# EAGLE board serial-header (EAGLE 6.4)
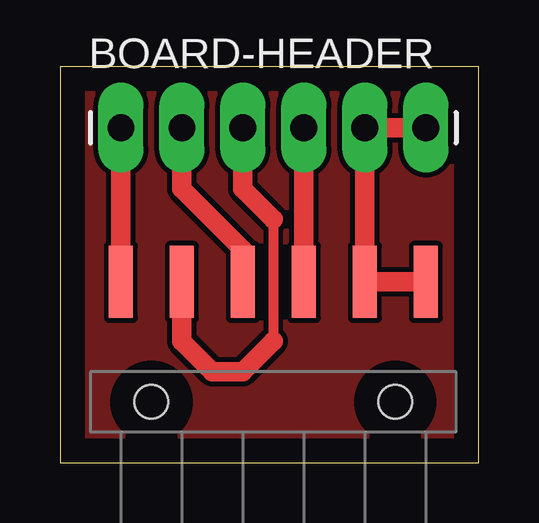
[diagram p0: board, top side]

Size 17.45 x 16.5 mm. Coordinates in mm from the lower left corner, seen from the top.
Outline: 0,0 17.45,0 17.45,16.5 0,16.5 0,0
Copper layers (1*16): Top 0.035mm / dielectric 1.5mm / Bottom 0.035mm
Design rules "default": minimum track width 10mil, minimum drill 24mil, track to track 8mil, track to pad 8mil, pad to pad 8mil, via to via 8mil, smd to smd 8mil, copper to edge 40mil, drill to drill 8mil, minimum pad ring 10mil, minimum via ring 8mil, stop-mask expansion 4mil, vias tented up to drill 0mil, thermal gap 10mil

## Footprints (pad centres in the part's own frame; a part is rotated, then mirrored left to right if it is on the bottom)
1X06_LONGPADS = drill 1.118 pad 1.88 long: 1 0,0; 2 2.54,0; 3 5.08,0; 4 7.62,0; 5 10.16,0; 6 12.7,0
1X06-SMD = smd 1 x 3: 1 -6.35,5; 2 -3.81,5; 3 -1.27,5; 4 1.27,5; 5 3.81,5; 6 6.35,5 | hole 1.4: -5.08,0; 5.08,0

## Placement (x,y rotation side)
BOARD-HEADER  [1X06_LONGPADS]  2.54,13.97 0 top
SERIAL-HEADER  [1X06-SMD]  8.89,2.54 0 top

## Library data of the parts
BOARD-HEADER SERIAL-HEADER = SparkFun-Connectors

## Nets
DTR: BOARD-HEADER.1 SERIAL-HEADER.1
GND: BOARD-HEADER.5 BOARD-HEADER.6 SERIAL-HEADER.5 SERIAL-HEADER.6
RXI: BOARD-HEADER.2 SERIAL-HEADER.3
TXO: BOARD-HEADER.3 SERIAL-HEADER.2
VCC_DNU: BOARD-HEADER.4 SERIAL-HEADER.4

## Tracks (layer width: path | path; a pad name or v marks a point on that pad's centre or on a via)
DTR
  Top 0.813: BOARD-HEADER.1 SERIAL-HEADER.1
GND
  Top 0.813: BOARD-HEADER.6 BOARD-HEADER.5 SERIAL-HEADER.5 SERIAL-HEADER.6
N$1
  pour Top: 0,0 17.78,0 17.78,16.51 0,16.51
RXI
  Top 0.813: BOARD-HEADER.2 5.08,11.43 7.62,8.89 SERIAL-HEADER.3
TXO
  Top 0.406: 8.89,10.16 8.89,5.08
  Top 0.813: BOARD-HEADER.3 7.62,11.43 8.89,10.16 | 8.89,5.08 7.62,3.81 6.35,3.81 5.08,5.08 SERIAL-HEADER.2
VCC_DNU
  Top 0.813: BOARD-HEADER.4 SERIAL-HEADER.4